# Altium PCB KC_Buffer_PCB.PcbDoc
Units mil, origin at the board's own origin, x right, y up, seen from the top; angles counter-clockwise.
Board outline 2015.75 x 1500 mil, 2 copper layers (Top Layer, Bottom Layer); 21 components, 16 nets, 42 pads, 0 vias.
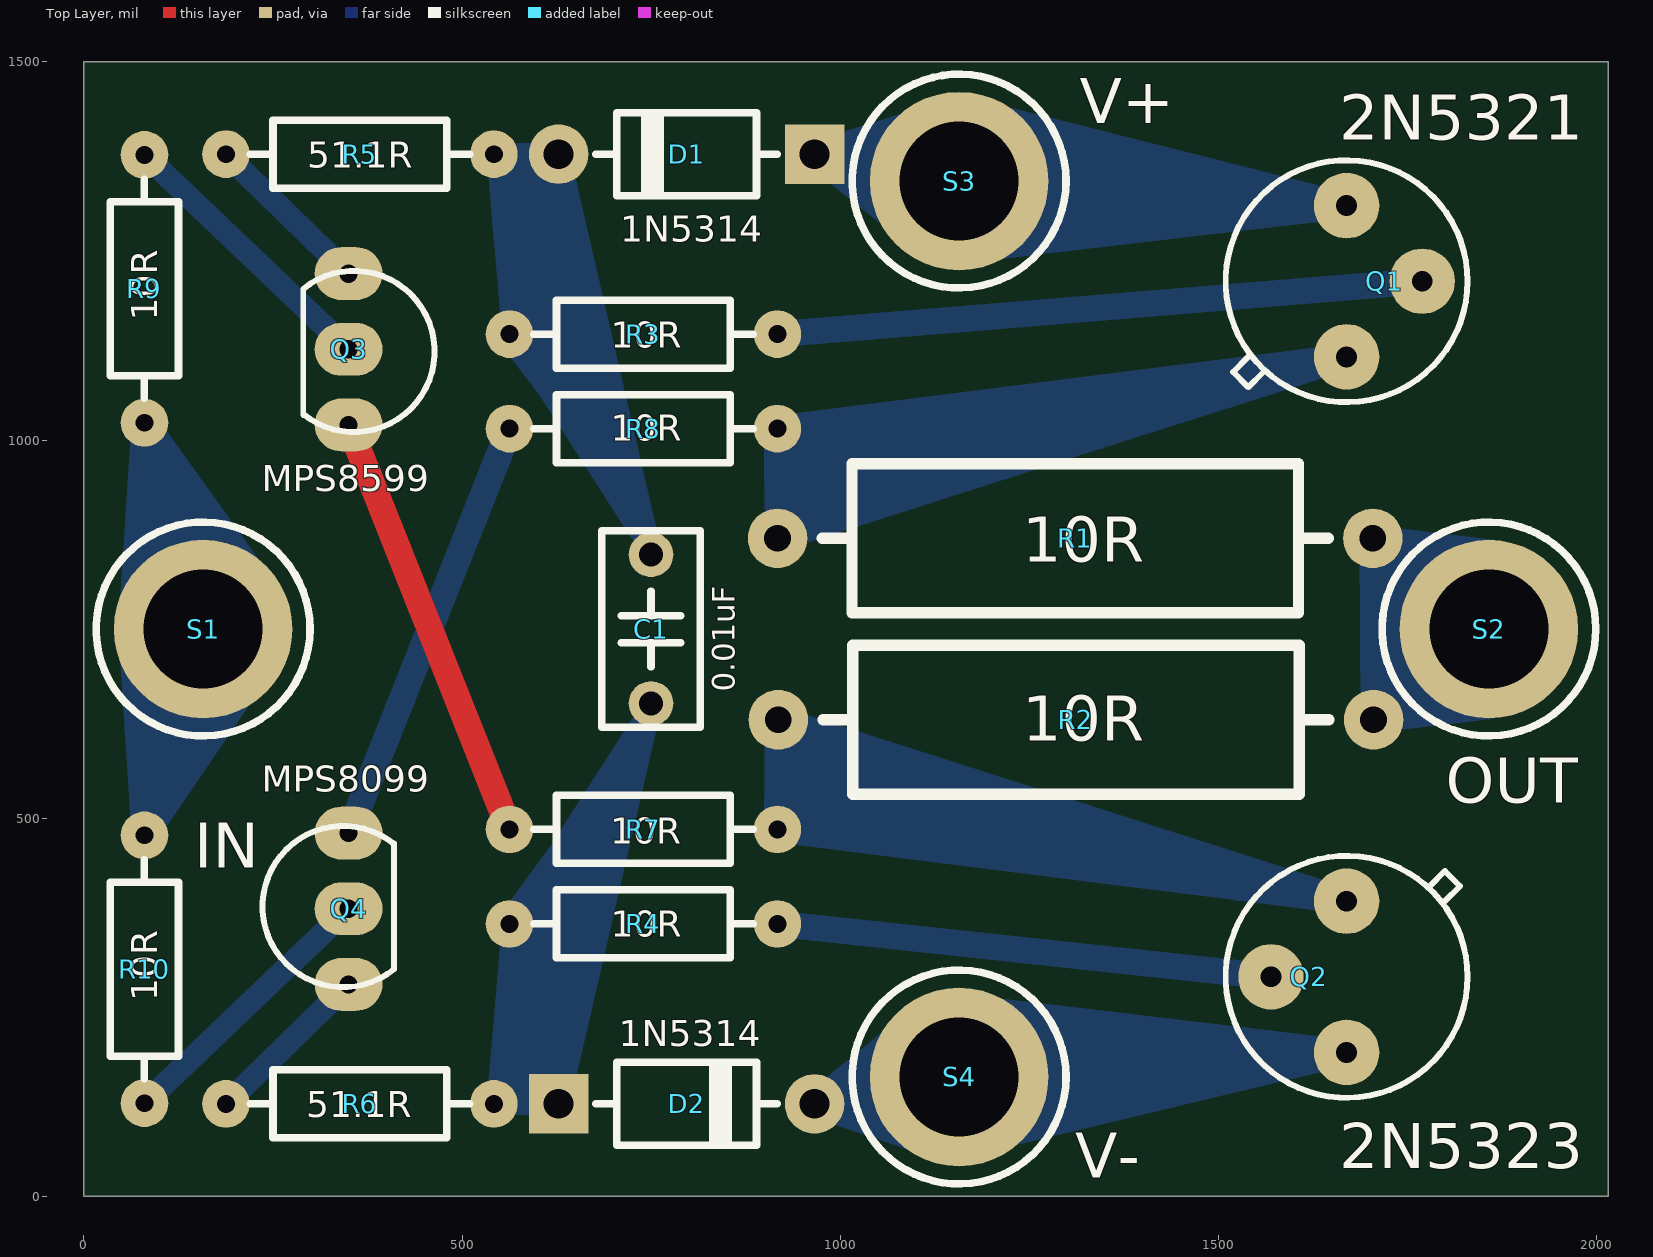
[diagram p0: Top Layer view]
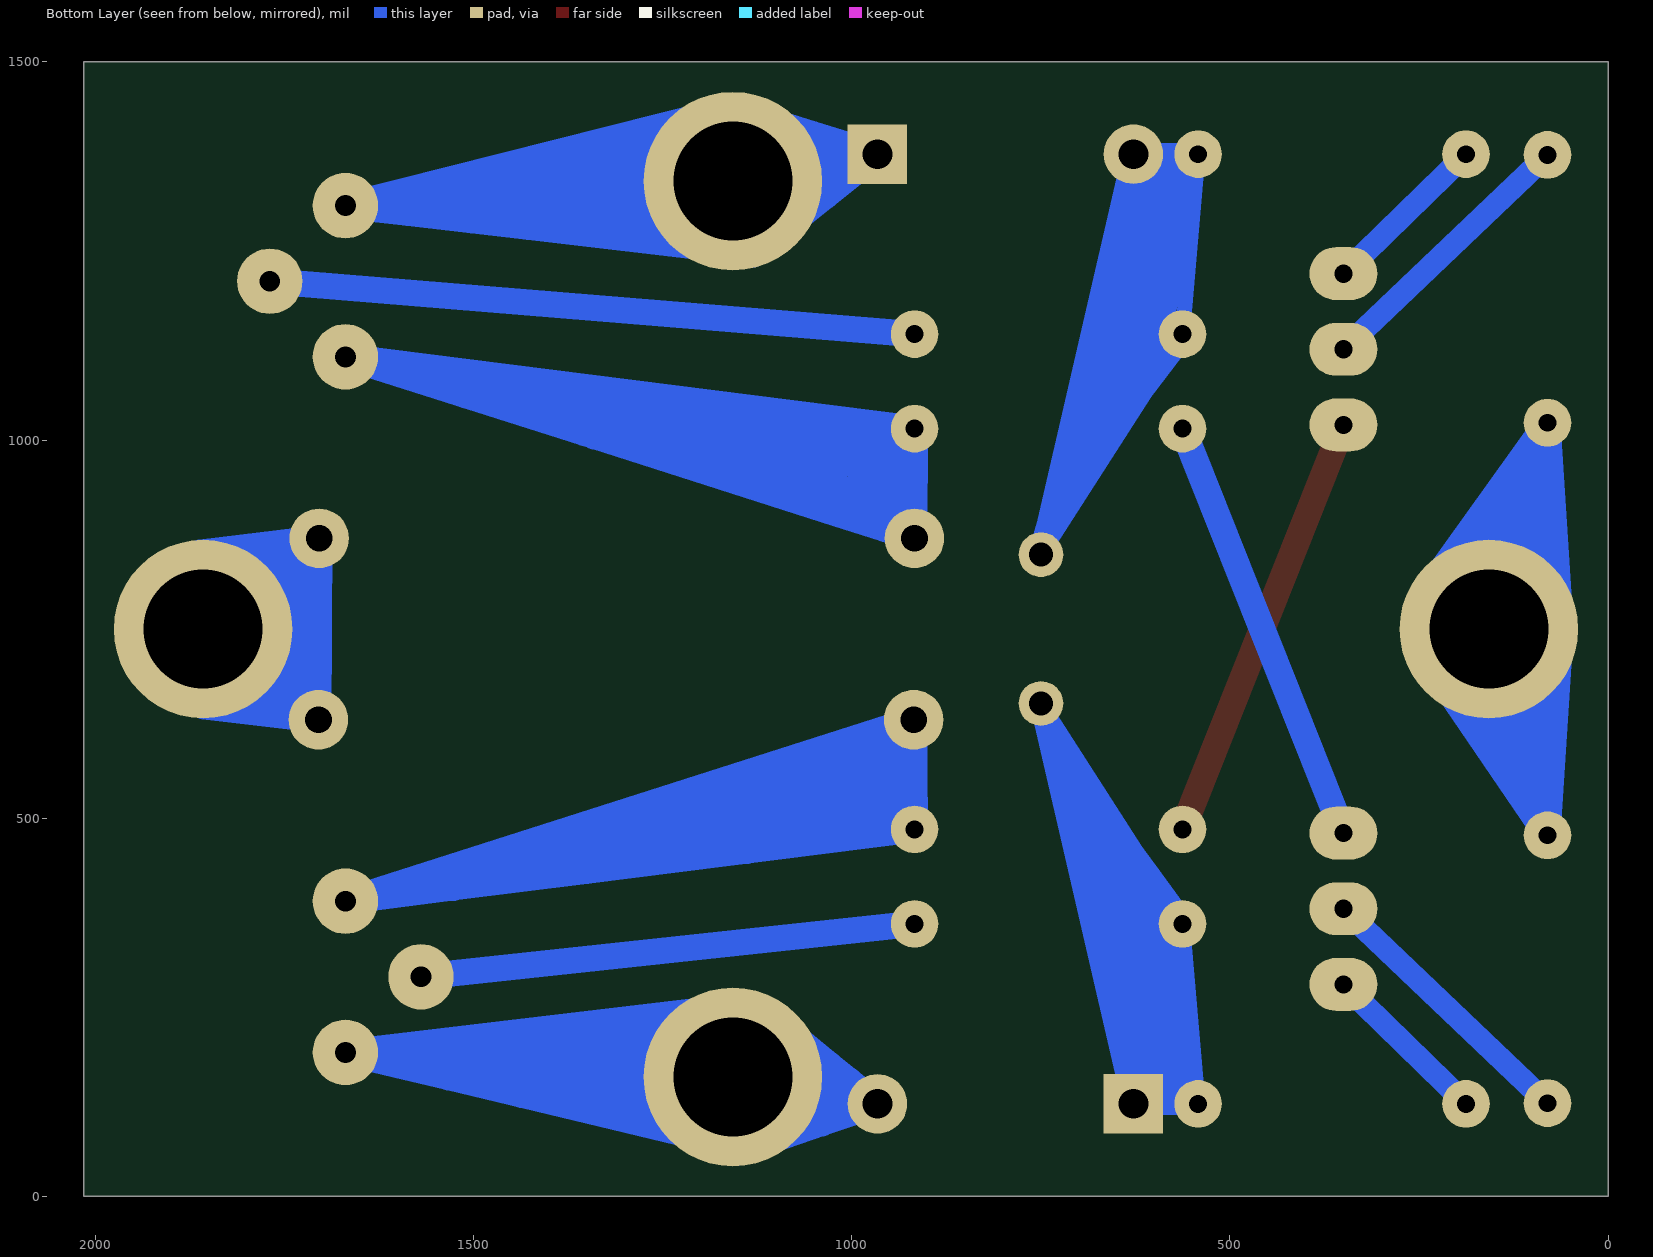
[diagram p1: Bottom Layer view, seen from below]
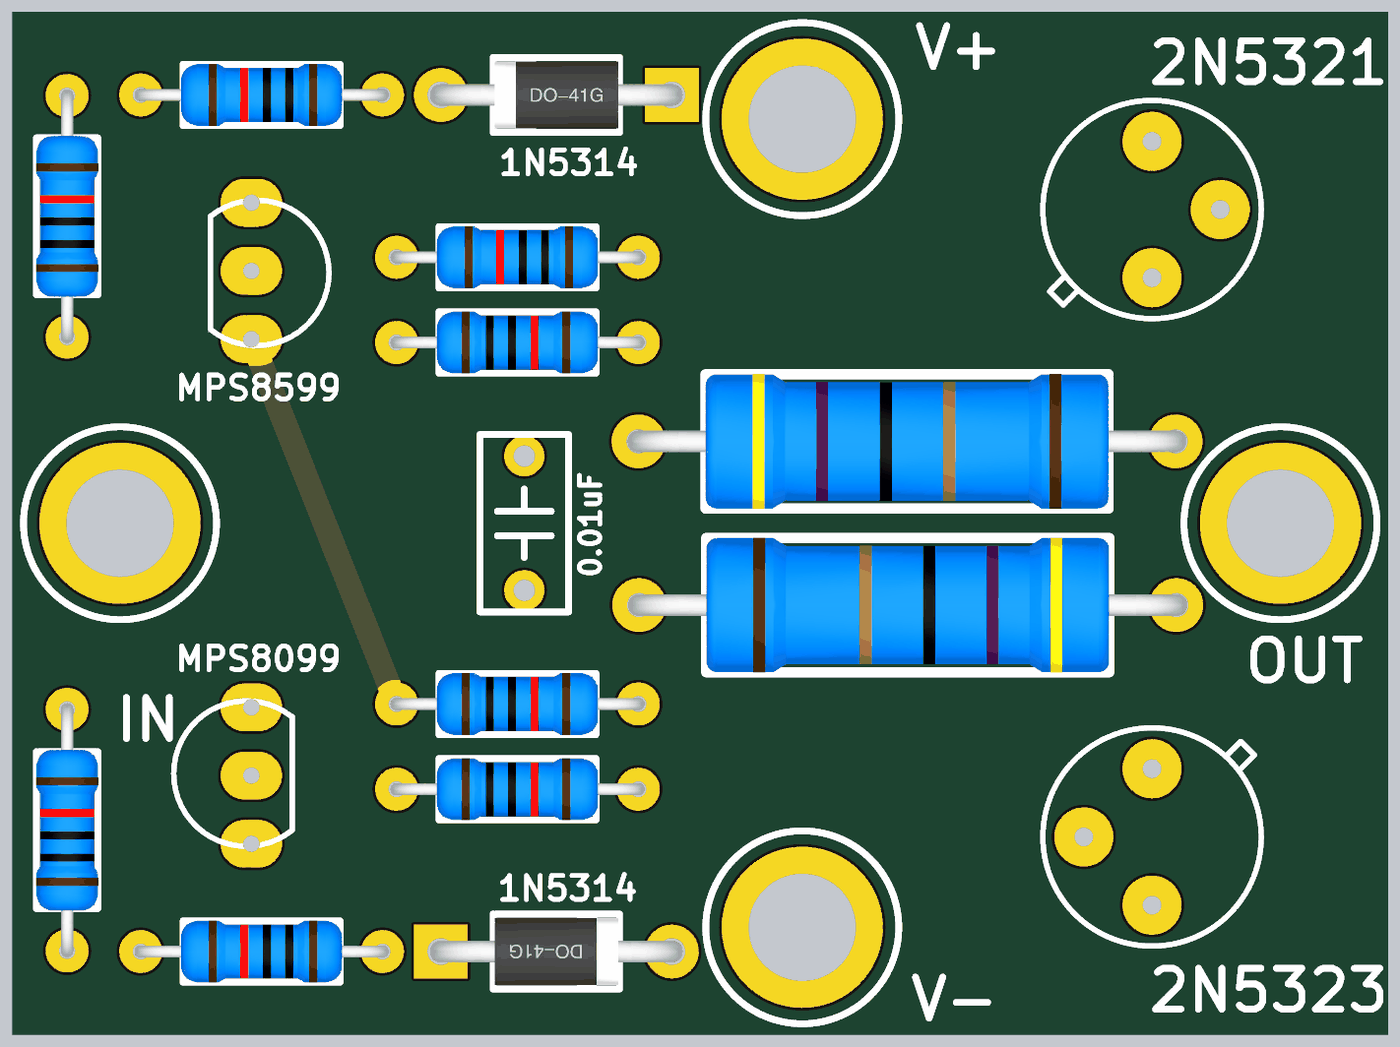
[diagram p2: 3D render of the assembled board from above, using the file's embedded part models]

## Layer stack, top to bottom
Top Solder: solder mask 0.4, Solder Resist, Dk 3.5
Top Layer: signal copper 1.4
Dielectric 1: dielectric 12.6, FR-4, Dk 4.8
Bottom Layer: signal copper 1.4
Bottom Solder: solder mask 0.4, Solder Resist, Dk 3.5

## Board outline
0,0 2015.75,0 2015.75,1500 0,1500

## Design rules (kind name [scope] priority, off if disabled: settings)
Clearance [All] p1: gap=10 ignorepadtopadclearanceinfootprint=FALSE except(0: Arc-Hole Track-Hole SMDPad-Hole THPad-Hole Via-Hole Fill-Hole Poly-Hole Region-Hole Text-Hole)
PolygonConnect [All] p1: connectstyle=Direct reliefconductorwidth=10 reliefentries=4 polygonreliefangle="90 Angle" airgapwidth=10
RoomDefinition KC_Buffer_Schematic [InComponentClass('KC_Buffer_Schematic')] p1: confinementstyle=ConfineIn formatcopy=TRUE lockcomponents=FALSE outline 6045,60 11145,60 11145,600 6045,600
RoutingVias [All] p1: holewidth=28 width=50 viastyle="Through Hole" minholewidth=28 minwidth=50 maxholewidth=28 maxwidth=50
SolderMaskExpansion [All] p1: expansion=4
Width [All] p1: maxlimit=50 minlimit=10 preferedwidth=35
30 further rules are at their usual default settings.

## Components (designator, comment, footprint, x,y, rotation, side; value= is the part's Value field where it differs from the comment)
C1 "0.01uF" "CBB 6.3*6.3*5" 750,750 r90 top
D1 "1N5314" DO-41G 797,1378 r180 top
D2 "1N5314" DO-41G 797,122 r0 top
Q1 "2N5321" TO39_SMALLHOLE 1670,1110 r270 top
Q2 "2N5323" TO39_SMALLHOLE 1670,390 r90 top
Q3 "MPS8599" TO92A_SmallHole 350,1220 r0 top
Q4 "MPS8099" TO92A_SmallHole 350,280 r180 top
R1 "10R" "RS 2W" 1311,870 r0 top
R2 "10R" "RS 2W" 1312,630 r180 top
R3 "10R" "RS 1/4W" 740,1140 r180 top
R4 "10R" "RS 1/4W" 740,360 r0 top
R5 "51.1R" "RS 1/4W" 365,1378 r180 top
R6 "51.1R" "RS 1/4W" 365,122 r180 top
R7 "10R" "RS 1/4W" 740,485 r0 top
R8 "10R" "RS 1/4W" 740,1015 r0 top
R9 "10R" "RS 1/4W" 80,1200 r90 top
R10 "10R" "RS 1/4W" 80,300 r90 top
S1 "IN" Screw-M4-Small 157.5,750 r0 top
S2 "OUT" Screw-M4-Small 1858.25,750 r0 top
S3 "V+" Screw-M4-Small 1157.4,1342.5 r0 top
S4 "V-" Screw-M4-Small 1157.4,157.5 r0 top

## Footprints (in the part's own frame and the unit in brackets; to place one, negate y for a bottom-side part, rotate by r counter-clockwise, add the part's x,y. Pads: shape width x height; smd on the part's side, far side on the other; paste and mask are expansions set on the pad)
"CBB 6.3*6.3*5" [mm] "脚距5mm高6.3mm厚3mm"
  round 1.5 hole 0.8: 1(-2.5,0) 2(2.5,0)
  silkscreen extent -3.3,-1.65 3.3,1.65, body extent -3.15,-1.5 3.15,1.5, height 6.8
DO-41G [mm] "2.5*8.6mm(直径，脚距）"
  rect 2x2 hole 1: 1(-4.3,0)
  round 2 hole 1: 2(4.3,0)
  silkscreen extent -3.05,-1.4 3.05,1.4, body extent -4.7,-1.25 4.7,1.25, height 2.55
"RS 1/4W" [mm] "直插色环电阻，脚距9mm，直径2.3mm"
  round 1.6 hole 0.6: 1(-4.5,0) 2(4.5,0)
  silkscreen extent -3.68,-1.14 3.68,1.14, body extent -4.72,-1.16 4.73,1.16, height 2.32
"RS 2W" [mm] "直插色环电阻，脚距20mm，直径5mm"
  round 2 hole 0.9: 1(10,0) 2(-10,0)
  silkscreen extent -8.5,-2.5 8.5,2.5, body extent -10.4,-2.51 10.4,2.51, height 5.11
Screw-M4-Small [mm]
  round 6 hole 4: 1(0,0)
  silkscreen extent -3.59,-3.59 3.59,3.59
TO39_SMALLHOLE [mm]
  round 2.2 hole 0.7: 1(0,0) 2(-2.54,2.54) 3(-5.08,0)
  silkscreen extent -6.6,-4.06 1.52,4.06
TO92A_SmallHole [mil]
  oval 90x70 hole 24.02: 1(0,0) 2(0,-100) 3(0,-200)
  silkscreen extent -60,-209 114,4

## Part data
C1: library part C-CBB, "CBB电容", BOM名称=CBB电容, 学习资源=www.ooocke.com, 版权归属=源创客
D1 D2: library part 1N5xxx, "Current Regulator Diodes"
Q1: library part 2N5320/5321, "中功率放大-NPN型 100V/1.2a"
Q2: library part 2N5322/5323, "中功率放大-PNP型 100V/1.2a"
Q3: library part MPS8598/8599, "音频放大-PNP型"
Q4: library part MPS8098/8099, "音频放大-NPN型"
R1 R2 R3 R4 R5 R6 R7 R8 R9 R10: library part R-CRR, "直插色环电阻", BOM名称=色环电阻, 学习资源=www.ooocke.com, 版权归属=源创客
S1 S2 S3 S4: library part ScrewConnector, "Screw Connector"

## Nets (pads, with @x,y where several pads share a name; then routed paths per layer and width w, separated by ;. In a path a pad name is that pad's centre, name@x,y a point inside that pad or via, vN(x,y) a via of type N, cw(c..) or ccw(c..) an arc to the next point about the centre after c; other vN are vias at no path point)
NetC1_1: C1.1 D2.1 R4.1 R6.1 | length 2923.2
  Bottom Layer w20: R6.1 R4.1 C1.1
  Bottom Layer w30: R6.1 D2.1 C1.1
  Bottom Layer w35: 555,161 561.28,157.63 D2.1 ; 561,168 653.8,483.62 ; R4.1 609.48,423.38 ; 564,228 593.09,352.96 609.48,423.38 ; 586,155 681.3,520.98 ; D2.1@607,148 724,579 681.3,520.98 ; 609.48,423.38 653.8,483.62 ; 653.8,483.62 681.3,520.98
NetC1_2: C1.2 D1.2 R3.2 R5.1 | length 2932.9
  Bottom Layer w20: R5.1 R3.2 C1.2
  Bottom Layer w30: R5.1 D1.2 C1.2
  Bottom Layer w35: R3.2 633.21,1047.51 ; R5.1@566,1365 680.04,985.95 ; 599,1113 593,1145.56 557,1341 606.26,1151.28 633.21,1047.51 ; D1.2@599,1363 C1.2 ; 715,940 680.04,985.95 ; 633.21,1047.51 680.04,985.95
NetD1_2: D1.1 Q1.3 S3.1 | length 2488
  Bottom Layer w35: S3.1@1131,1246 1099.98,1270.86 1034.84,1323.06 ; S3.1@1156,1437 1130.48,1429.06 1052.16,1404.7 ; S3.1@1164,1251 1168.01,1251.47 1427.79,1281.76 ; S3.1@1177,1434 1180.21,1433.19 Q1.3 1587.08,1300.33 ; S3.1@1199,1432 S3.1@1200.86,1431.09 ; S3.1@1245,1386 1587.08,1300.33 ; S3.1@1248,1297 1378.31,1292.58 ; S3.1@1259,1349 1501.31,1290.33 ; S3.1@1262,1318 1378.31,1292.58 ; 1015.87,1393.42 1016.38,1391.51 1034.84,1323.06 ; 1015.87,1393.42 D1.1 1034.84,1323.06 ; 1015.87,1393.42 1052.16,1404.7 ; 1034.84,1323.06 1044.06,1366.54 1052.16,1404.7 ; 1378.31,1292.58 1427.79,1281.76 ; 1427.79,1281.76 1501.31,1290.33 ; 1501.31,1290.33 1587.08,1300.33
NetD2_1: D2.2 Q2.3 S4.1 | length 2606.8
  Bottom Layer w35: S4.1@1116,244 1098.52,229.75 1030,173.91 ; S4.1@1149,254 S4.1@1158.32,253.91 ; S4.1@1152,58 1126.18,66.9 1040.06,96.58 ; S4.1@1154,251 1168.25,249.31 Q2.3 1603.38,174.06 ; S4.1@1156,67 1177.81,72.22 1533.4,157.31 ; S4.1@1179,62 S4.1@1198.75,71.5 ; S4.1@1240,211 1603.38,174.06 ; S4.1@1250,127 1436.68,134.17 S4.1@1253,156 ; S4.1@1256,178 1533.4,157.31 ; 1003.87,152.62 1005.73,124.63 1006.84,108.03 ; 1003.87,152.62 D2.2 1006.84,108.03 ; 1003.87,152.62 1030,173.91 ; 1006.84,108.03 1040.06,96.58 ; 1030,173.91 1034.22,141.46 1040.06,96.58 ; 1533.4,157.31 1603.38,174.06
NetQ1_1: Q1.1 R1.2 R8.2 | length 3508.6
  Bottom Layer w35: 983,929 997.56,932.09 ; 1354.39,1009.37 974.02,965.19 ; 1510.47,1059.13 956.99,989.13 ; R8.2 982,911 961.46,963.73 ; R8.2 956.36,882.46 ; R8.2 R1.2 956.36,882.46 ; R8.2 Q1.1 1341.14,1005.14 ; 951.82,988.48 961.46,963.73 ; 951.82,988.48 945,1006 956.99,989.13 ; 951.82,988.48 956.99,989.13 ; 956.36,882.46 1018.72,902.34 ; 956.99,989.13 974.02,965.19 ; 961.46,963.73 974.02,965.19 ; 974.02,965.19 997.56,932.09 ; 997.56,932.09 1018.72,902.34 ; 997.56,932.09 1341.14,1005.14 ; 1018.72,902.34 1341.14,1005.14
NetQ1_3: Q1.2 R3.1 | length 882.5
  Top Layer w10: R3.1 ccw(c941.31,1164.14) R3.1@941.31,1130
  Bottom Layer w35: R3.1 Q1.2
NetQ2_1: Q2.1 R2.1 R7.2 | length 3283.8
  Bottom Layer w35: R7.2@927,513 1139.36,456.96 ; 935,536 1222.75,471.72 ; 935,594 1527.24,408.02 ; 917.83,570.05 1222.75,471.72 ; 917.83,570.05 R2.1 Q2.1 1527.24,408.02 ; 917.83,570.05 R7.2 1351.53,430.19 ; 1222.75,471.72 1351.53,430.19 ; 1351.53,430.19 1527.24,408.02
NetQ2_3: Q2.2 R4.2 | length 656.6
  Bottom Layer w35: R4.2 Q2.2
NetQ3_1: Q3.2 R9.2 | length 372.9
  Bottom Layer w30: R9.2 Q3.2
NetQ3_2: Q3.3 R7.1 | length 575.8
  Top Layer w35: Q3.3 R7.1
NetQ3_3: Q3.1 R5.2 | length 226.4
  Bottom Layer w30: R5.2 Q3.1
NetQ4_1: Q4.2 R10.1 | length 372.9
  Bottom Layer w30: R10.1 Q4.2
NetQ4_2: Q4.3 R8.1 | length 575.8
  Bottom Layer w35: Q4.3 R8.1
NetQ4_3: Q4.1 R6.2 | length 226.4
  Bottom Layer w30: R6.2 Q4.1
NetR1_1: R1.1 R2.2 S2.1 | length 1441.7
  Bottom Layer w10: S2.1@1855.09,656.2 S2.1@1861,656 ; S2.1@1856.79,836.9 S2.1@1863,837
  Bottom Layer w35: R1.1@1736,858 R1.1@1735.73,856 ; S2.1@1746,747 R2.2 ; S2.1@1756,744 1729.5,809.09 ; S2.1@1761,701 R2.2 ; S2.1@1766,808 1733.7,840.67 ; S2.1@1800,681 R2.2 ; S2.1@1800,827 R1.1@1735.73,856 ; S2.1@1857,648 R2.2 ; S2.1@1862,851 R1.1 ; R1.1 1729.5,809.09 ; R1.1 1733.7,840.67 ; R1.1 R1.1@1735.73,856 ; R1.1 R2.2 ; R2.2 1724.02,767.84 1729.5,809.09 ; 1729.5,809.09 1733.7,840.67 ; 1733.7,840.67 R1.1@1735.73,856
NetR9_1: R9.1 R10.2 S1.1 | length 2361.8
  Bottom Layer w10: S1.1@45,754 S1.1@46.36,764.47 ; S1.1@63,748.03 S1.1@63.48,755.82
  Bottom Layer w35: S1.1@62,764 63,748.03 63.25,744.09 R10.2 ; S1.1@63,749 63.42,755.84 R9.1 ; 83,975 84.68,969.92 ; S1.1@96,842 84.68,969.92 ; S1.1@100,680 R10.2 ; S1.1@128,661 R10.2 ; S1.1 84.68,969.92 ; S1.1@159,661 R10.2 ; S1.1@165,845 R9.1 ; S1.1@237,804 235.56,806 R9.1 ; S1.1@248,723 231.77,699.25 R10.2 ; R9.1 84.68,969.92
  Bottom Layer w40: S1.1@231.21,799.18 S1.1@234,795

## Silkscreen, mask and mechanical layers (free items; w line width, h text height)
Mechanical 1:
  the board outline again, w10
Drill Drawing:
  the board outline again, w10